# Altium PCB base-board_v0.PcbDoc (part 2 of 3)
Units mm, origin at the board's own origin, x right, y up, seen from the top; angles counter-clockwise.
Board outline 82.49 x 71.25 mm, 4 copper layers (1 Top Layer, 2 Signal Layer, 3 GND Layer, 4 Bottom Layer), stack 1.57 mm thick; 189 components, 152 nets, 678 pads, 239 vias.
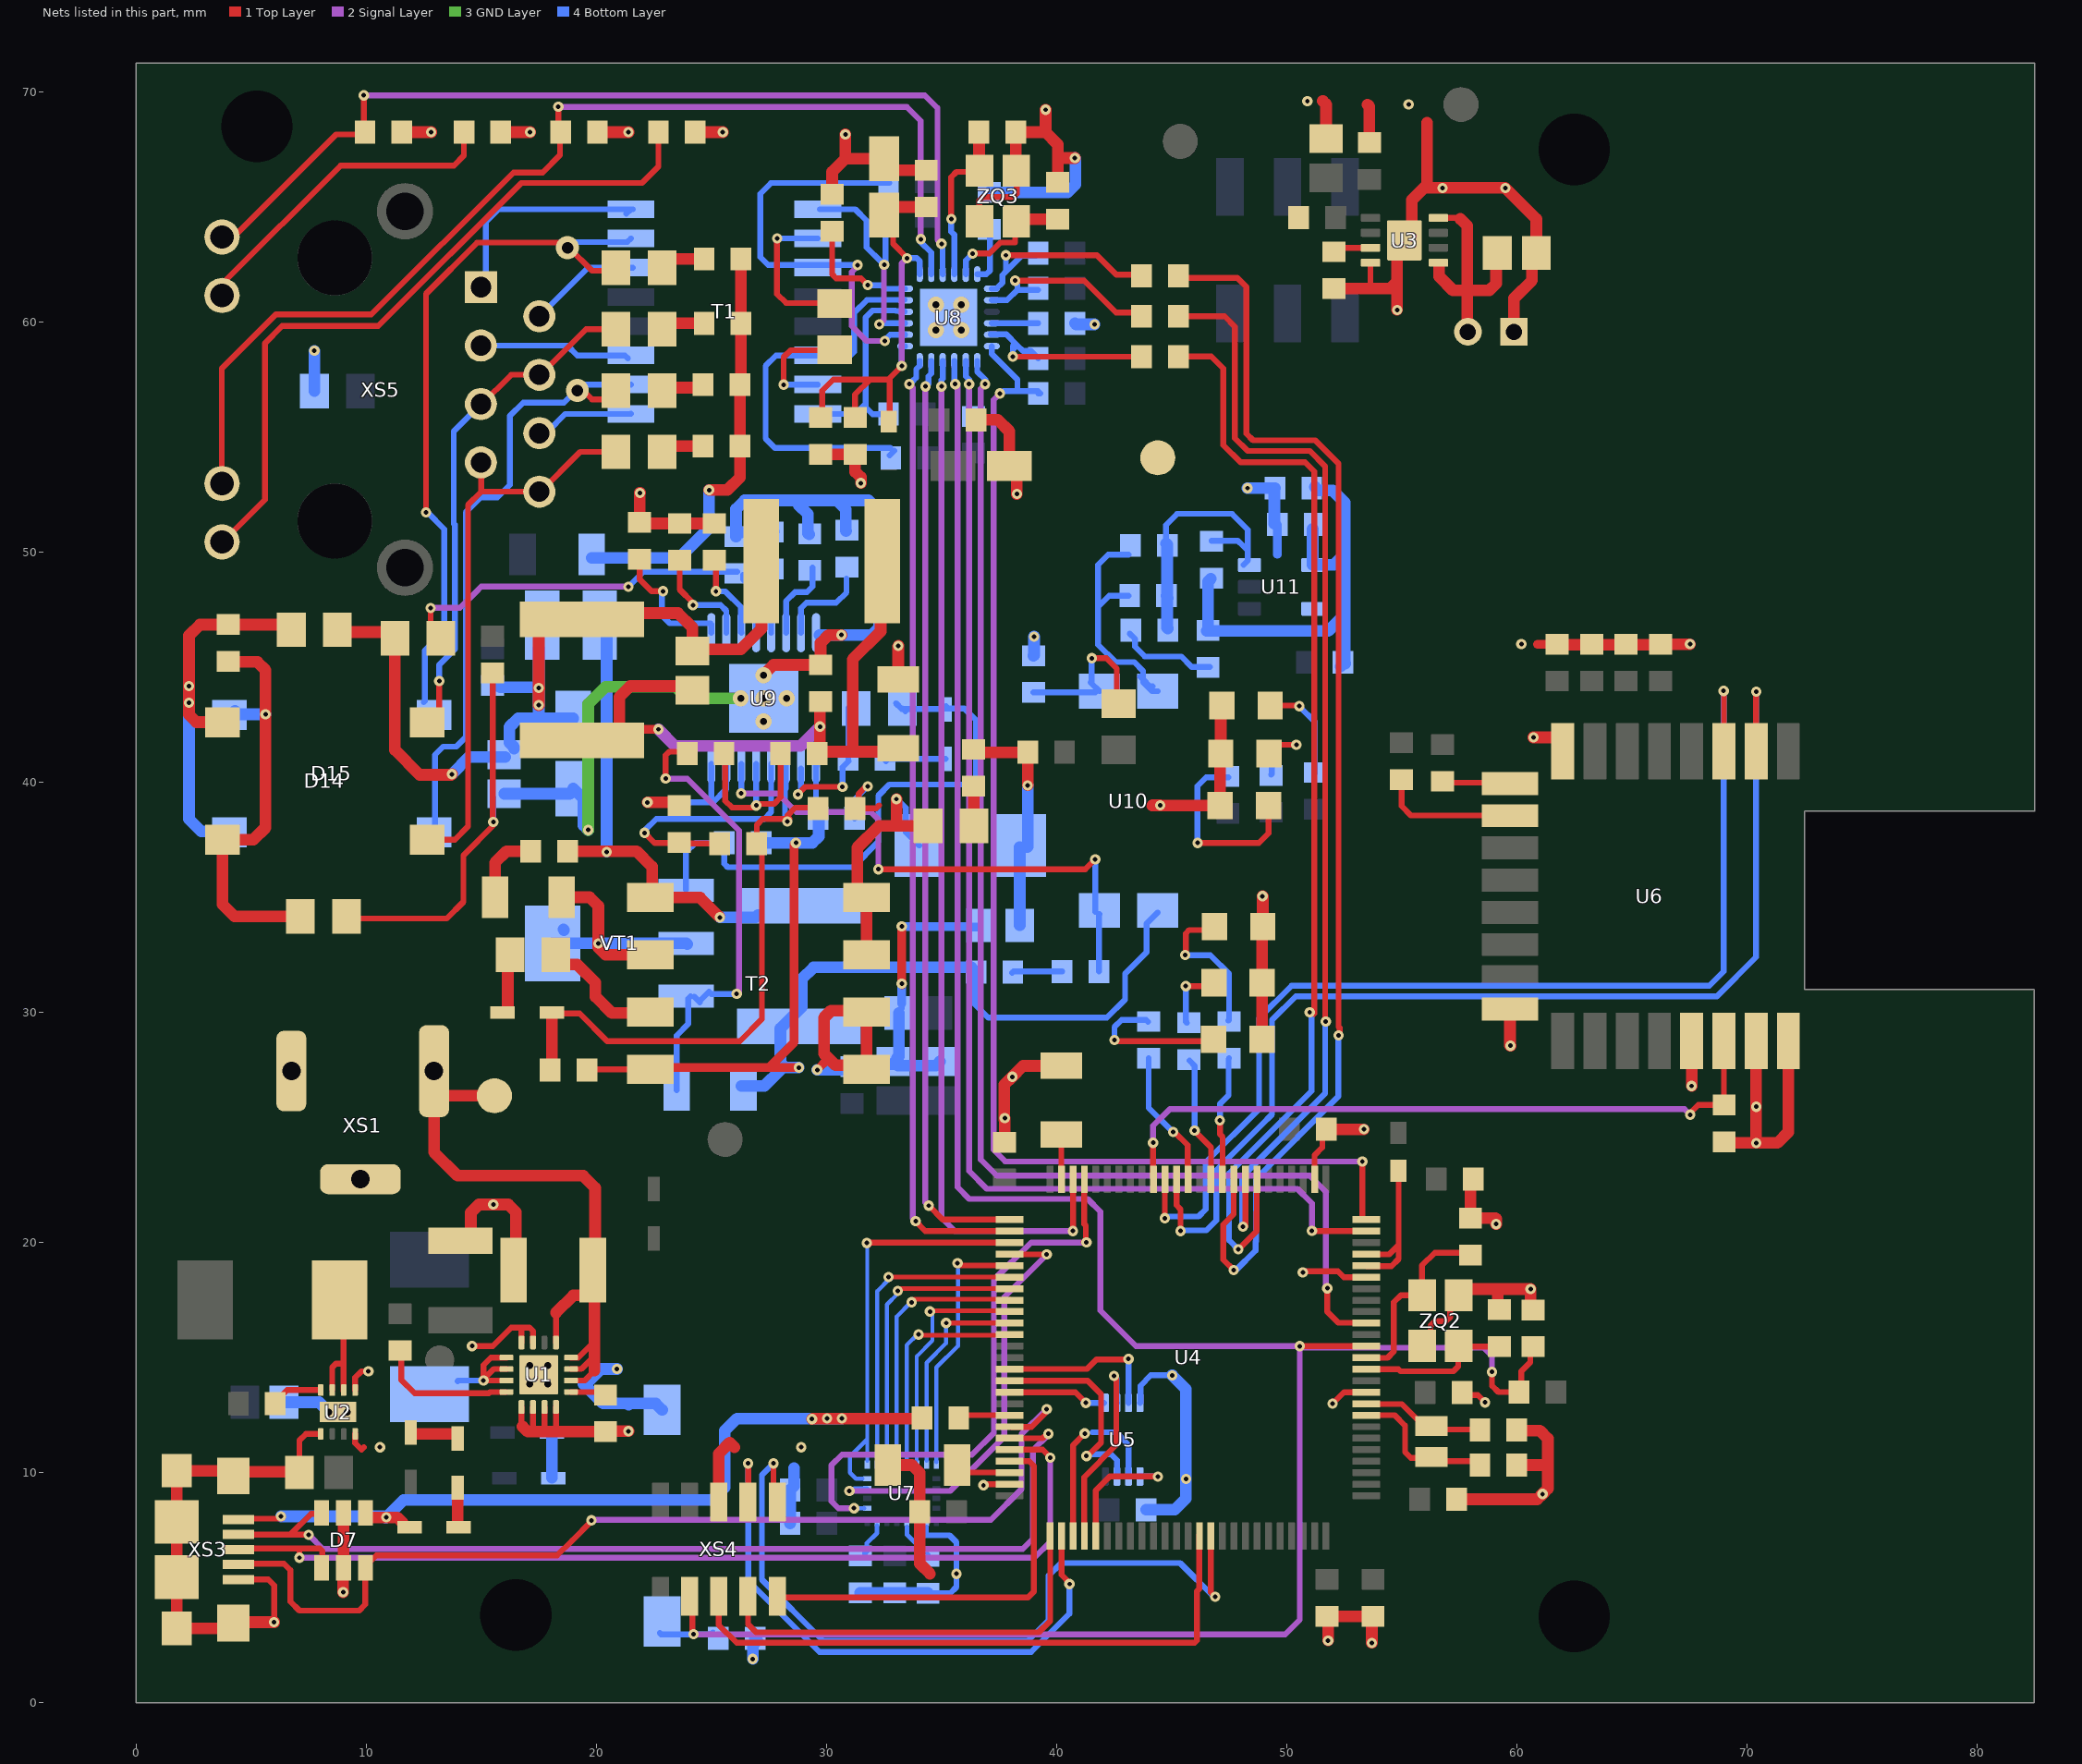
[diagram p4: the nets of this part, all layers, seen from the top]

## Via types
v1: diameter 0.45, hole 0.2, 1 Top Layer to 4 Bottom Layer, tented both sides, 217 vias
v2: diameter 0.7, hole 0.3, 1 Top Layer to 4 Bottom Layer, 11 vias
v3: diameter 0.6, hole 0.2, 1 Top Layer to 4 Bottom Layer, tented bottom, 4 vias
v4: diameter 0.7, hole 0.3, 1 Top Layer to 4 Bottom Layer, tented top, 4 vias
v5: diameter 1, hole 0.5, 1 Top Layer to 4 Bottom Layer, 2 vias
v6: diameter 0.45, hole 0.2, 1 Top Layer to 4 Bottom Layer, 1 vias

## Nets (pads, with @x,y where several pads share a name; then routed paths per layer and width w, separated by ;. In a path a pad name is that pad's centre, name@x,y a point inside that pad or via, vN(x,y) a via of type N, cw(c..) or ccw(c..) an arc to the next point about the centre after c; other vN are vias at no path point) (continued)
GND: C1.1 C2.1 C3.1 C4.1 C5.1 C6.1 C7.1 C8.1 C9.1 C10.1 C11.1 C12.1 C13.2 C14.1 C15.2 C16.1 C17.1 C18.1 C19.1 C20.1 C21.1 C22.1 C23.1 C24.1 C25.1 C26.1 C27.2 C28.2 C29.2 C30.2 C31.2 C32.2 C33.1 C34.2 C35.2 C36.2 C37.2 C38.2 C39.2 C40.2 C41.2 C42.2 C43.2 C44.2 C45.2 C66.2 C68.2 C69.1 C70.1 C71.2 C80.2 D7.2 D7.5 D8.1 D9.1 D10.1 D11.1 D12.1 D13.1 pad.9 R8.1 R25.1 R26.1 R28.1 R29.1 R30.1 R31.1 R45.2 R47.2 R59.2 R60.2 R61.2 SB1.2 U1.5 U1.6 U1.7 U1.8 U1.15 U1.16 U1.17 U2.1 U2.4 U2.5 U2.9 U3.4 U3.9 U4.10 U4.20 U4.27 U4.74 U5.4 U6.8 U6.16 U6.21 U6.23 U6.24 U7.19 U7.20 U8.25 U9.15 U9.16 U11.5 XS1.2 XS1.3 XS2.1 XS3.5 XS3.6 XS3.7 XS3.8 XS3.9 XS3.10 XS3.11 XS4.6 ZQ2.2 ZQ2.4 ZQ3.2 ZQ3.4 | length 252.4
  1 Top Layer w0.254: XS3.5@4.449,5.355 5.745,5.355 6,5.1 v1(6,3.5) ; C4.1@7.1,10.033 7.1,11.4 7.384,11.684 U2.1@8.025,11.684 ; U2.4@9.525,11.684 9.525,11.275 9.8,11 9.9,11.1 ; U2.5@9.525,13.584 9.525,14.125 9.8,14.4 v1(10.1,14.4) ; v1(14.6,15.5) 15.5,15.5 16.3,16.3 16.751,16.3 17.101,16.3 17.25,16.151 U1.15@17.25,15.65 ; U1.5@16.75,12.85 16.75,12.05 16.8,12 ; U1.16@16.75,15.65 16.75,16.299 ; 17.025,11.775 17.25,12 U1.6@17.25,12.85 ; 17.7,11.775 17.75,11.825 U1.7@17.75,12.85 ; 18.2,11.775 18.25,11.825 U1.8@18.25,12.85 ; C69.1@31.242,38.862 32.162,38.862 32.3,39 ; C69.1@31.4,39.125 31.4,39.5 31.725,39.825 v1(31.8,39.825) ; ZQ3.4@36.65,64.375 36.65,65.276 36.799,65.425 38.126,65.425 38.275,65.574 38.275,66.55 ZQ3.2@38.25,66.575 ; v1(36.825,9.45) 36.878,9.45 36.921,9.493 U4.74@37.962,9.493 ; v1(50.7,18.7) 50.75,18.75 52.225,18.75 52.482,18.493 U4.20@53.462,18.493 ; U4.27@51.212,22.743 51.212,23.787 51.55,24.125 51.55,24.75 C22.1@51.725,24.925 ; v1@52,13.1 v1(52,13) 52.493,13.493 U4.10@53.462,13.493 ; C10.1@52.05,61.45 C10.1@52.175,61.325 ; 53.6,61.45 53.643,61.493 U3.4@53.643,62.576 ; ZQ2.2@55.883,15.505 56.25,15.872 56.25,16.375 56.45,16.575 56.925,16.575 57.1,16.75 57.1,17.322 ZQ2.4@57.483,17.705 ; C26.1@57.625,13.475 57.732,13.368 58.307,13.368 v1(58.625,13.05)
  1 Top Layer w0.381: 60.9,46 C28.2@61.75,46
  1 Top Layer w0.508: XS3.7@4.224,3.455 3.999,3.23 XS3.9@1.774,3.23 XS3.11@1.774,5.455 XS3.10@1.774,7.855 XS3.8@1.774,10.08 3.999,10.08 XS3.6@4.224,9.855 4.402,10.033 C4.1@7.1,10.033 ; XS3.7@4.224,3.5 v1(6,3.5) ; v1(9,4.8) 9,5.838 D7.5@9.017,5.855 D7.2@9.017,8.255 ; R28.1@11.55,68.25 v1(12.825,68.25) ; C2.1@14.1,20.075 14.229,20.075 14.55,20.396 14.55,21.3 14.9,21.65 v1(15.525,21.65) 16.175,21.65 16.5,21.325 16.5,18.35 C1.1@16.6,18.25 ; R30.1@15.85,68.25 v1(17.125,68.25) ; 16.8,12 17.025,11.775 17.7,11.775 18.2,11.775 C3.1@20.4,11.775 20.425,11.8 v1(21.4,11.8) ; R29.1@20.05,68.25 v1(21.4,68.25) ; v1(21.9,52.575) 21.881,52.556 R45.2@21.881,51.296 21.931,51.246 C68.2@23.631,51.246 C66.2@25.131,51.246 ; v1(22.225,39.125) 23.46,39.125 C70.1@23.597,38.989 ; R31.1@24.3,68.25 v1(25.5,68.25) ; XS4.6@25.324,8.723 25.324,10.824 25.8,11.3 26,11.1 ; C39.2@29.75,54.25 C38.2@31.25,54.25 31.25,53.491 31.495,53.245 31.5,53.25 v1(31.5,53) ; R26.1@30.25,65.55 30.25,66.525 30.825,67.1 ; v1(30.825,68.15) 30.825,67.1 ; C41.2@32.512,67.093 32.512,66.996 32.908,66.6 C40.2@34.336,66.6 ; C41.2@32.512,67.1 30.825,67.1 ; C17.1@32.674,10.326 33.724,10.326 34.061,9.989 C21.1@34.061,8.306 34.061,6.039 34.5,5.6 ; C80.2@33.122,44.475 33.122,45.897 33.125,45.9 v1(33.125,45.925) ; C44.2@36.5,55.75 37.45,55.75 37.95,55.25 C42.2@37.95,53.75 38.275,53.425 v1(38.275,52.525) ; C24.1@37.744,24.359 37.675,24.428 37.741,24.494 37.7,24.535 37.75,24.585 v1@37.75,25.366 ; v1(37.75,25.4) v1@37.75,25.366 ; ZQ3.2@38.25,66.575 38.238,66.587 38.238,68.237 C43.2@38.225,68.25 39.525,68.25 ; v1(39.525,69.225) 39.525,68.25 ; C45.2@40.056,66.065 40.056,67.125 ; C18.1@40.15,27.675 38.55,27.675 v1(38.075,27.2) 37.725,26.85 37.725,25.341 v1@37.75,25.366 ; v1(40.8,67.125) 40.056,67.125 ; v1(44.5,39) 44.175,39 44.164,38.989 D11.1@47.108,38.989 47.108,41.158 D12.1@47.125,41.175 ; D13.1@47.125,43.25 47.134,43.241 D12.1@47.134,41.25 ; D10.1@48.929,28.829 48.929,31.204 D9.1@48.975,31.25 ; D9.1@48.938,31.293 48.938,33.813 D8.1@48.95,33.825 ; v1(48.95,35.05) 48.961,35.039 D8.1@48.961,33.729 ; C9.1@50.469,64.594 C9.1@50.521,64.541 ; 51.575,69.6 51.725,69.45 51.714,69.439 C7.1@51.714,67.969 ; C22.1@51.725,24.925 51.73,24.92 v1(53.355,24.92) ; v1(51.8,2.7) 51.8,3.7 C25.1@51.75,3.75 C27.2@53.75,3.75 53.7,3.7 v1(53.7,2.6) ; C10.1@52.05,61.45 53.6,61.45 54.495,61.45 54.793,61.748 ; 53.512,69.45 53.594,69.368 C8.1@53.594,67.792 ; v1(54.8,60.525) 54.793,60.532 54.793,61.748 ; 56.1,65.825 v1(56.775,65.825) v1(59.5,65.825) 60.85,64.475 C6.1@60.85,63 60.661,62.811 60.661,61.811 59.875,61.025 XS2.1@59.875,59.575 ; 56.1,68.65 56.1,65.968 55.443,65.311 55.443,63.876 U3.9@55.118,63.551 54.793,63.226 54.793,61.748 ; C20.1@57.378,8.839 60.889,8.839 v1(61.12,9.07) 61.35,9.3 61.35,10.388 ; ZQ2.4@57.483,17.705 57.753,17.975 59.177,17.975 ; C23.1@58.1,22.75 57.988,22.638 C15.2@57.988,21.056 59.069,21.056 59.1,21.025 v1(59.1,20.8) ; C13.2@59.242,17.076 59.177,17.141 59.177,17.975 ; U6.16@59.705,30.145 59.705,28.57 v1(59.725,28.55) ; C12.1@60,10.325 61.287,10.325 61.35,10.388 ; C14.1@60,11.85 60.025,11.825 61,11.825 61.35,11.475 61.35,10.388 ; C16.1@60.706,17.069 60.6,17.174 v1(60.6,17.975) 59.177,17.975 ; v1(60.725,41.95) 61.754,41.95 62,41.704 U6.8@62,41.34 ; C28.2@61.7,45.975 66.225,45.975 C31.2@66.25,46 v1(67.525,46) ; v1(67.6,26.8) U6.21@67.6,28.75 ; R8.1@69.012,24.371 69.058,24.325 v1(70.4,24.325) ; U6.23@70.4,28.75 v1(70.4,24.325) ; U6.24@71.8,28.75 71.8,24.8 71.325,24.325 v1(70.4,24.325) ; 39.525,68.25 40.056,67.719 40.056,67.125
  4 Bottom Layer w0.203: U7.20@33.912,7.8 33.912,7.538 34.175,7.275 ; 34.353,7.297 34.353,7.625
  4 Bottom Layer w0.254: v1(22.225,39.125) 25.075,39.125 ; U9.16@25,40.8 25,39.2 25.075,39.125 ; U9.15@25.65,40.8 25.65,39.7 25.075,39.125 ; R47.2@31.229,38.43 31.229,39.254 v1(31.8,39.825) ; 34.175,7.275 34.375,7.275 ; 34.353,7.297 34.375,7.275 ; C33.1@34.404,4.763 C33.1@34.417,4.75 35.375,4.75 35.65,5.025 v1(35.65,5.6) 35.65,6.975 35.35,7.275 34.375,7.275 ; U5.4@43.625,13.03 43.648,13.053 43.648,13.773 44.1,14.225 v1(45.025,14.225)
  4 Bottom Layer w0.381: 49.6,49.9 R59.2@49.6,51.2
  4 Bottom Layer w0.508: C5.1@6.426,13.056 7.953,13.056 v2(8.375,12.634) ; R61.2@7.75,57 v1(7.75,58.75) ; v1(20.9,14.5) 20.2,14.5 19.55,13.85 19.45,13.85 20.3,13 21.442,13 ; 21.4,12.958 21.442,13 ; SB1.2@22.86,12.723 22.583,13 21.442,13 ; v1(26.8,1.9) 26.8,2.492 27,2.692 C19.1@26.898,2.794 ; C36.2@28.423,7.798 C35.2@28.423,9.246 28.6,9.423 28.6,10.2 ; C32.2@31.471,4.775 C34.2@32.969,4.775 32.982,4.763 C33.1@34.404,4.763 ; C37.2@37.075,65.625 40.475,65.625 40.825,65.975 40.825,67.1 v1(40.8,67.125) ; C71.2@39,45.5 39.025,45.525 v1(39.025,46.325) ; R25.1@40.805,59.944 40.849,59.9 v1(41.65,59.9) ; C11.1@43.891,8.382 45.132,8.382 45.625,8.875 v1(45.625,9.725) 45.625,13.625 v1(45.025,14.225) ; v1(48.3,52.781) R60.2@49.492,52.781 49.467,52.756 R59.2@49.467,51.232
  other v1: 10.6,11.1 28.9,11.1 70.4,25.9 60.2,46 55.3,69.45 50.9,69.6
  other v2: 9.175,12.634 17.1,13.85 17.9,13.85 17.1,14.65 17.9,14.65
  other v4: 34.756,59.648 35.856,59.648 34.756,60.748 35.856,60.748
JTDI: U4.77 XS4.4 | length 26
  1 Top Layer w0.254: XS4.4@26.568,8.941 26.6,8.972 v1(26.6,10.4) ; U4.77@40.212,7.243 40.212,5.559 40.564,5.207 v1(40.564,5.156)
  4 Bottom Layer w0.254: v1(26.6,10.4) 26.6,5.3 29.7,2.2 38.9,2.2 40.564,3.864 v1(40.564,5.156)
JTDO: U4.89 XS4.5 | length 27
  1 Top Layer w0.254: XS4.5@25.324,4.623 25.324,3.376 26.1,2.6 46,2.6 46.1,2.7 46.1,4.845 46.2,4.945 46.2,7.287 U4.89@46.203,7.29
LED_G_A: R28.2 U8.3 XS5.9 | length 41.9
  1 Top Layer w0.254: XS5.9@3.759,63.754 4.293,63.754 8.687,68.148 R28.2@9.775,68.148 ; R28.2@9.627,68.423 R28.2@9.775,68.275 ; R28.2@9.9,68.497 v1(9.9,69.85)
  2 Signal Layer w0.254: v1(9.9,69.85) 9.875,69.875 9.9,69.875 9.925,69.85 34.275,69.85 34.825,69.3 34.825,63.575 v1(35,63.4)
  4 Bottom Layer w0.254: v1(35,63.4) 35.05,63.35 35.05,62.087 U8.3@35.056,62.081
LED_G_K: R30.2 XS5.10 | length 14.4
  1 Top Layer w0.254: XS5.10@3.736,61.152 3.736,61.648 8.89,66.802 13.818,66.802 14.249,67.234 R30.2@14.249,68.301
LED_Y_A: R29.2 U8.2 XS5.11 | length 48.6
  1 Top Layer w0.254: XS5.11@3.736,52.982 3.725,52.993 3.725,57.975 6.075,60.325 10.225,60.325 16.4,66.5 17.675,66.5 18.425,67.25 R29.2@18.425,68.175 ; R29.2@18.325,68.35 18.275,68.4 18.375,68.5 18.351,68.524 v1(18.351,69.353)
  2 Signal Layer w0.254: v1@18.325,69.425 18.351,69.399 v1@18.351,69.374 ; v1(18.351,69.353) v1@18.351,69.374 ; v1(34.1,63.6) 34.1,68.75 33.5,69.35 18.351,69.35 18.318,69.35 18.347,69.378 v1@18.351,69.374
  4 Bottom Layer w0.254: v1(34.1,63.6) 34.1,63.472 34.2,63.372 34.45,63.122 34.475,63.097 34.556,63.016 U8.2@34.556,62.081
LED_Y_K: R31.2 XS5.12 | length 31.2
  1 Top Layer w0.254: XS5.12@3.775,50.45 5.6,52.275 5.6,59.075 6.35,59.825 10.525,59.825 16.743,66.043 21.993,66.043 22.7,66.75 R31.2@22.7,68.25
MCU_LED1: R4.2 U4.35 | length 5.4
  1 Top Layer w0.254: v1(47.1,25.3) 47.1,24.7 47.219,24.581 U4.35@47.219,22.819
  4 Bottom Layer w0.254: v1(47.1,25.3) 47.1,26.025 47.475,26.4 47.475,27.975 R4.2@47.5,28
MCU_LED2: R5.2 U4.36 | length 5.5
  1 Top Layer w0.254: v1(45.999,24.867) 45.999,24.841 46.712,24.129 U4.36@46.712,22.743
  4 Bottom Layer w0.254: R5.2@45.775,27.9 45.999,27.676 v1(45.999,24.867)
MCU_LED3: R6.2 U4.38 | length 5.9
  1 Top Layer w0.254: v1(45.063,24.8) 45.125,24.8 45.7,24.225 U4.38@45.7,22.8
  4 Bottom Layer w0.254: R6.2@44,28 44,25.863 v1(45.063,24.8)
MEM_HOLD: U4.65 U5.7 | length 9.5
  1 Top Layer w0.254: U4.65@38.049,13.995 41.351,13.995 41.935,13.411 41.935,11.303 41.411,10.778 41.419,10.77 41.368,10.719 41.3,10.787 v1(41.3,10.719)
  4 Bottom Layer w0.254: v1(41.3,10.719) 41.3,10.795 41.351,10.744 v1@41.427,10.82 ; v1@41.453,10.795 42.367,10.795 42.625,10.537 U5.7@42.625,9.83
MEM_WP: U4.64 U5.3 | length 7.1
  1 Top Layer w0.254: U4.64@38.151,14.503 41.326,14.503 41.732,14.91 43.051,14.91 43.076,14.935 v1(43.129,14.935)
  4 Bottom Layer w0.254: U5.3@43.125,13.03 43.129,13.034 v1(43.129,14.935)
NetC3_2: C3.2 U1.9 | length 1.2
  1 Top Layer w0.254: U1.9@18.9,13.5 C3.2@20.1,13.5
NetC10_2: C10.2 U3.3 | length 1.6
  1 Top Layer w0.254: C10.2@52.075,63.2 52.101,63.226 U3.3@53.643,63.226
NetC12_2: C12.2 U4.8 ZQ1.2 | length 6.6
  1 Top Layer w0.254: U4.8@53.462,12.493 54.69,12.493 55.143,12.04 55.143,10.897 55.397,10.643 ZQ1.2@56.322,10.643 ; ZQ1.2@56.289,10.675 ZQ1.2@56.322,10.643 ; ZQ1.2@56.388,10.643 ZQ1.2@56.322,10.643 ; C12.2@58.4,10.325 58.4,10.352 58.252,10.5 56.465,10.5 ZQ1.2@56.322,10.643
NetC13_1: C13.1 U4.12 ZQ2.3 | length 6.7
  1 Top Layer w0.254: U4.12@53.462,14.493 54.861,14.493 54.954,14.4 57.25,14.4 57.455,14.605 57.455,15.443 ZQ2.3@57.506,15.494 ; ZQ2.3@57.531,15.469 57.538,15.476 C13.1@59.242,15.476
NetC14_2: C14.2 U4.9 ZQ1.1 | length 5.5
  1 Top Layer w0.254: U4.9@53.467,12.979 54.991,12.979 55.855,12.116 56.072,12.116 ZQ1.1@56.199,12.116 ; ZQ1.1@56.072,12.243 ZQ1.1@56.199,12.116 ; ZQ1.1@56.289,12.025 ZQ1.1@56.199,12.116 ; C14.2@58.154,11.875 56.53,11.875 56.289,12.116 ZQ1.1@56.199,12.116
NetC15_1: C15.1 U4.13 ZQ2.1 | length 8.2
  1 Top Layer w0.254: U4.13@53.442,14.986 54.381,14.986 54.661,15.265 54.661,17.399 54.966,17.704 55.784,17.704 55.883,17.605 ZQ2.1@55.883,17.705 55.883,19.002 56.439,19.558 C15.1@57.582,19.558
NetC17_2: C17.2 U4.73 | length 2.2
  1 Top Layer w0.254: C17.2@35.865,10.033 35.932,10.1 36.1,10.1 36.195,10.005 37.95,10.005 U4.73@37.962,9.993
NetC18_2: C18.2 U4.49 | length 1.5
  1 Top Layer w0.254: U4.49@40.208,23.2 C18.2@40.208,24.689
NetC32_1: C32.1 U7.24 | length 1.4
  4 Bottom Layer w0.203: C32.1@31.75,6.575 31.75,6.925 32.203,7.378 U7.24@32.203,7.7
  4 Bottom Layer w0.254: C32.1@31.675,6.5 C32.1@31.75,6.575
NetC33_2: C33.2 U7.21 | length 1.7
  4 Bottom Layer w0.203: 33.5,7.625 33.5,7.3 34.1,6.7 C33.2@34.2,6.7
  4 Bottom Layer w0.254: C33.2@34.087,6.63 34.291,6.426 C33.2@34.392,6.426
NetC37_1: C37.1 U8.6 | length 2.4
  4 Bottom Layer w0.254: U8.6@36.556,62.081 36.951,62.081 37.1,62.229 C37.1@37.1,64.025
NetC38_1: C38.1 C39.1 C40.1 C41.1 FB2.1 U8.1 U8.19 | length 20.3
  1 Top Layer w0.254: C39.1@29.75,55.85 29.82,55.92 29.82,57.02 30.3,57.5 31.9,57.5 ; C38.1@31.25,55.85 31.25,56.85 31.9,57.5 ; C41.1@32.588,64.211 32.664,64.135 C41.1@32.9,64.135 ; 32.741,57.5 31.9,57.5 ; FB2.1@32.75,55.9 32.75,57.566 33.249,58.064 v1@33.299,58.064 ; C41.1@32.9,64.9 C41.1@32.9,64.135 ; v1(33.5,62.775) 33.5,62.8 32.9,63.4 C41.1@32.9,64.135
  1 Top Layer w0.508: C41.1@32.512,64.643 32.869,65 C40.1@34.336,65
  2 Signal Layer w0.254: v1(33.274,58.09) 33.274,62.549 v1(33.5,62.775)
  4 Bottom Layer w0.254: v1(33.274,58.09) 33.274,58.936 33.286,58.948 U8.19@33.423,58.948 ; v1(33.5,62.775) 33.925,62.775 34.05,62.65 34.05,62.087 U8.1@34.056,62.081
NetC43_1: C43.1 U8.4 ZQ3.3 | length 7.2
  1 Top Layer w0.254: v1(35.425,64.475) 35.425,66.3 35.65,66.525 ZQ3.3@36.625,66.525
  1 Top Layer w0.508: C43.1@36.55,68.175 36.637,68.088 36.637,66.587 ZQ3.3@36.65,66.575
  4 Bottom Layer w0.254: v1(35.425,64.475) 35.425,63.925 35.556,63.794 U8.4@35.556,62.081
NetC45_1: C45.1 U8.5 ZQ3.1 | length 5.3
  1 Top Layer w0.254: v1(36.35,62.975) 37.09,62.975 37.57,63.455 38.2,63.455 ZQ3.1@38.2,64.4
  1 Top Layer w0.508: ZQ3.1@38.25,64.375 38.34,64.465 39.525,64.465
  4 Bottom Layer w0.254: U8.5@36.056,62.081 36.056,62.681 v1(36.35,62.975)
NetC46_2: C46.2 C48.2 C55.2 C56.2 C57.2 D16.2 L3.2 R33.2 R39.2 | length 36.2
  1 Top Layer w0.508: R33.2@8.825,46.525 10.975,46.525 R39.2@11.25,46.25 11.25,41.4 12.325,40.325 13.7,40.325 v1(13.725,40.35) ; C57.2@17.425,47.175 17.5,47.1 v1(17.5,44.1) ; v1(17.5,43.35) 17.5,44.05 v1@17.525,44.075 ; C57.2@21.025,47.35 23.55,47.35 24.175,46.725 C55.2@24.175,45.775 ; C55.2@24.175,45.7 C55.2@24.175,45.775 ; C56.2@27.175,49.6 27.175,46.675 26.275,45.775 C55.2@24.175,45.775
  4 Bottom Layer w0.508: v1(13.725,40.35) 14.475,41.1 C48.2@16.05,41.1 ; C46.2@15.748,44.196 15.819,44.125 17.375,44.125 17.5,44 v1(17.5,43.35) 17.5,42.8 ; C48.2@16.425,41.45 16.425,41.52 16.225,41.72 16.225,42.4 16.6,42.775 D16.2@19,42.775 ; v1(17.5,44.1) L3.2@17.5,45.825
NetC47_1: C47.1 D14.2 D15.2 R38.1 | length 18.5
  1 Top Layer w0.508: C47.1@4.05,45.25 4.075,45.225 5.275,45.225 5.625,44.875 v1(5.625,42.95) 5.625,38.025 5.1,37.5 D14.2@3.75,37.5 3.75,34.7 4.287,34.163 R38.1@7.144,34.163
  4 Bottom Layer w0.508: D15.2@4.275,43.075 4.3,43.1 4.45,42.95 v1(5.625,42.95)
NetC47_2: C47.2 D14.1 D15.1 R33.1 | length 17.3
  1 Top Layer w0.508: D14.1@3.75,42.6 3.736,42.614 2.623,42.614 2.3,42.937 v1(2.3,44.175) 2.3,46.375 2.775,46.85 C47.2@3.975,46.85 ; C47.2@4,46.85 6.525,46.85 R33.1@6.625,46.75
  4 Bottom Layer w0.508: v1(2.3,44.175) 2.3,38.4 2.84,37.86 4.02,37.86 D15.1@4.054,37.826
  other v1: 2.3,43.45
NetC48_1: C48.1 C53.1 C72.1 C73.1 C79.2 D16.1 R38.2 R49.1 R51.1 U9.8 U9.17 | length 59.5
  1 Top Layer w0.254: R38.2@9.225,34.1 9.25,34.075 13.5,34.075 14.225,34.8 14.225,36.825 15.525,38.125 v1(15.525,38.275) 15.5,38.3 C53.1@15.5,44.75
  1 Top Layer w0.508: v2@27.3,44.7 27.7,45.1 C79.2@29.75,45.1 29.75,46.05 30.1,46.4 v1(30.65,46.4)
  3 GND Layer w0.508: v1(19.65,37.925) 19.65,43.399 20.396,44.145 23.456,44.145 23.952,43.65 26.25,43.65 v2@26.275,43.675
  4 Bottom Layer w0.254: C48.1@15.5,39.375 15.525,39.35 v1(15.525,38.275)
  4 Bottom Layer w0.508: C48.1@16.002,39.497 18.847,39.497 D16.1@18.875,39.525 ; D16.1@19,39.725 19.443,39.282 19.443,38.132 v1(19.65,37.925) ; C72.1@26.075,50.675 26.075,51.875 26.45,52.25 27.225,52.25 ; C72.1@26.275,50.85 C72.1@26.3,50.85 ; R49.1@27.575,50.8 R49.1@27.65,50.875 ; R49.1@27.7,50.9 27.675,50.925 27.675,51.65 27.225,52.1 27.225,52.25 ; C73.1@29.25,50.775 29.2,50.825 29.2,51.65 28.775,52.075 28.775,52.25 ; U9.8@29.7,46.4 v1(30.65,46.4) 31.975,46.4 32.3,46.725 32.3,51.775 31.825,52.25 30.45,52.25 ; R51.1@30.85,50.925 30.836,50.939 30.836,51.864 30.45,52.25 ; 27.225,52.25 28.775,52.25 ; 28.775,52.25 30.45,52.25
  other v2: 27.275,42.65 26.275,43.65 27.275,43.65 28.275,43.65 27.275,44.65
NetC49_1: C49.1 C50.1 C51.1 C52.1 C54.2 | length 18.6
  1 Top Layer w0.508: v1(24.9,52.7) 25.7,52.7 26.25,53.25 C49.1@26.25,54.7 ; C49.1@26.162,54.483 26.238,54.559 C49.1@26.238,54.61 C51.1@26.238,57.277 ; C51.1@26.289,57.277 C50.1@26.289,59.944 C52.1@26.289,62.738
  4 Bottom Layer w0.508: C54.2@19.8,49.75 23.6,49.75 24.9,51.05 v1(24.9,52.7)
NetC49_2: C49.2 R34.1 | length 1.7
  1 Top Layer w0.508: R34.1@22.987,54.61 C49.2@24.638,54.61
NetC50_2: C50.2 R35.1 | length 1.6
  1 Top Layer w0.508: R35.1@23.114,59.944 C50.2@24.689,59.944
NetC51_2: C51.2 R36.1 | length 1.7
  1 Top Layer w0.508: R36.1@22.987,57.15 24.511,57.15 C51.2@24.638,57.277
NetC52_2: C52.2 R37.1 | length 1.6
  1 Top Layer w0.508: R37.1@23.114,62.611 23.114,62.621 23.231,62.738 C52.2@24.689,62.738
NetC59_1: C59.1 R42.1 | length 3.4
  1 Top Layer w0.508: R42.1@15.6,35 15.6,36.5 16.1,37 C59.1@17.15,37 C59.1@17.275,37
NetC60_1: C60.1 C65.2 D17.2 R41.1 | length 9.9
  1 Top Layer w0.508: C60.1@36.424,41.427 36.551,41.3 R41.1@38.748,41.3 v1(38.748,39.865)
  4 Bottom Layer w0.508: C65.2@38.403,33.782 D17.2@38.403,37.184 ; D17.2@38.735,37.186 38.748,37.198 v1(38.748,39.865)
NetC60_2: C60.2 R40.2 | length 1.5
  1 Top Layer w0.508: C60.2@36.398,39.827 36.398,38.329 R40.2@36.424,38.303
NetC66_1: C66.1 U9.3 | length 3.9
  1 Top Layer w0.254: C66.1@25.05,49.675 25.2,49.525 v1(25.2,48.3)
  4 Bottom Layer w0.254: v1(25.2,48.3) 25.205,48.295 25.605,48.295 26.282,47.618 26.282,46.518 U9.3@26.3,46.5
NetC67_2: C67.2 C69.2 D18.2 R44.1 U9.11 | length 27.4
  1 Top Layer w0.254: D18.2@18.07,29.947 19.279,29.947 20.472,28.753 26.238,28.753 27.2,29.715 27.2,37.1 R44.1@26.962,37.338 ; R44.1@26.975,37.338 26.975,38.151 27.224,38.4 v1@28.3,38.4 ; C69.2@29.38,38.6 C69.2@29.642,38.862 ; C69.2@29.6,38.9 28.649,38.9 28.3,38.551 v1@28.3,38.4 ; v1@28.3,38.4 28.4,38.4 v1(28.3,38.3) v1@28.3,38.4
  1 Top Layer w0.508: C67.2@18,27.5 18.07,27.57 18.07,29.947 D18.2@18.07,30
  4 Bottom Layer w0.254: v1@28.2,38.3 28.2,39.691 28.232,39.722 28.232,40.83 U9.11@28.245,40.843
NetC68_1: C68.1 U9.2 | length 4.7
  1 Top Layer w0.254: C68.1@23.625,49.65 23.625,48.375 24.2,47.8 v1(24.2,47.7)
  4 Bottom Layer w0.254: v1(24.2,47.7) 25.4,47.7 25.65,47.45 U9.2@25.65,46.5
NetC70_2: C70.2 R44.2 U9.12 | length 11.5
  1 Top Layer w0.254: v1(22.1,37.8) 22.537,37.363 C70.2@23.647,37.363 ; C70.2@23.622,37.44 23.724,37.338 R44.2@25.362,37.338
  4 Bottom Layer w0.254: v1(22.1,37.8) 22.1,37.899 22.606,38.405 27.305,38.405 27.6,38.7 U9.12@27.6,40.8
NetC71_1: C71.1 R46.1 U10.1 | length 7
  1 Top Layer w0.254: v1(41.529,45.39) 42.164,45.39 42.621,44.933 R46.1@42.621,43.51
  4 Bottom Layer w0.254: C71.1@39,43.9 U10.1@41.69,43.9 ; v1(41.529,45.39) 41.529,44.386 41.478,44.336 U10.1@41.859,43.955
NetC72_2: C72.2 R39.1 U9.4 | length 18.2
  1 Top Layer w0.254: v1(12.8,47.575) 12.8,46.7 R39.1@13.25,46.25
  2 Signal Layer w0.254: v1(12.8,47.575) 14.075,47.575 14.775,48.275 15,48.5 v1(21.4,48.5)
  4 Bottom Layer w0.254: v1(21.4,48.5) 22.05,49.15 C72.2@26.125,49.15 ; C72.2@26.375,49 26.375,48.825 26.95,48.25 U9.4@26.95,46.5
NetC73_2: C73.2 U9.6 | length 3.6
  4 Bottom Layer w0.254: U9.6@28.25,46.5 28.25,47.875 28.625,48.25 28.632,48.257 29.157,48.257 29.4,48.5 C73.2@29.4,49.325
NetC74_1: C74.1 R54.2 R56.1 R59.1 R60.1 U11.4 | length 20.6
  4 Bottom Layer w0.508: R56.1@46.533,46.571 51.803,46.571 52.527,47.295 ; R56.1@46.584,46.596 46.584,48.717 C74.1@46.711,48.844 ; R59.1@51.13,51.003 51.13,49.45 52.066,49.45 52.527,49.911 ; R60.1@51.232,52.832 51.384,52.68 51.994,52.68 52.527,52.146 52.527,49.911 ; R54.2@52.351,45.037 R54.2@52.527,45.212 ; R54.2@52.553,45.161 52.527,45.187 R54.2@52.527,45.212 ; R54.2@52.527,45.212 52.527,47.295 ; 52.527,47.295 52.527,49.911
NetC74_2: C74.2 C76.1 C77.1 R53.1 U11.3 | length 12
  4 Bottom Layer w0.254: R53.1@44.755,50.368 44.755,51.181 45.237,51.664 47.625,51.664 48.311,50.978 48.311,50.063 ; C74.2@46.736,50.495 47.879,50.495 48.125,50.249 48.311,50.063 ; U11.3@48.125,49.45 48.311,49.636 48.311,50.063
  4 Bottom Layer w0.508: R53.1@44.767,50.368 44.806,50.33 C76.1@44.806,48.032 ; C76.1@44.78,48.108 44.805,48.082 C76.1@44.805,48.032 ; C77.1@44.831,46.685 44.805,46.711 C76.1@44.805,48.032 ; C76.1@44.831,48.006 C76.1@44.805,48.032
NetC75_2: C75.2 R48.1 | length 2.2
  4 Bottom Layer w0.254: C75.2@38.075,31.725 C75.2@38.1,31.75 38.125,31.775 R48.1@40.246,31.775
NetC76_2: C76.2 R53.2 U10.2 | length 10.9
  4 Bottom Layer w0.254: C76.2@43.129,48.108 42.291,48.108 41.808,47.625 ; R53.2@43.129,49.886 42.24,49.886 41.808,49.454 41.808,47.625 ; U10.2@43.636,44.59 U10.2@43.764,44.462 ; U10.2@44.171,44.171 44.056,44.171 U10.2@43.764,44.462 ; U10.2@44.399,43.955 44.158,43.955 43.764,44.348 U10.2@43.764,44.462 ; 41.808,47.625 41.808,45.974 42.558,45.225 43.375,45.225 43.764,44.836 U10.2@43.764,44.462
NetC77_2: C77.2 R56.2 | length 4.3
  4 Bottom Layer w0.254: C77.2@43.18,46.457 43.409,46.228 43.409,45.891 43.834,45.466 45.415,45.466 45.872,45.009 R56.2@46.66,45.009
NetC78_2: C78.2 R55.1 U9.13 | length 8.6
  1 Top Layer w0.254: R55.1@25.603,41.3 25.603,39.192 25.895,38.9 26.86,38.9 v1(26.949,38.989) 27.018,39.057 27.729,39.057 28.016,39.345 C78.2@28.016,41.326
  4 Bottom Layer w0.254: v1(26.949,38.989) U9.13@26.95,40.8
NetD2_2: D2.2 D3.1 | length 2
  4 Bottom Layer w0.508: D2.2@18.07,11.75 18.07,9.78 D3.1@18.075,9.775
NetD4_2: D4.2 D5.1 | length 1.7
  1 Top Layer w0.508: D5.1@13.97,9.344 13.97,7.747 D4.2@14.021,7.696
NetD5_2: D5.2 D6.1 | length 2.2
  1 Top Layer w0.508: D6.1@11.938,11.684 13.954,11.684 13.97,11.668 D5.2@13.97,11.484
NetD8_2: D8.2 R4.1 | length 6.6
  1 Top Layer w0.254: v1(45.593,32.487) 45.618,32.512 45.618,33.43 45.767,33.579 46.711,33.579 D8.2@46.861,33.729
  4 Bottom Layer w0.254: v1(45.593,32.487) 46.685,32.487 47.498,31.674 47.498,29.667 R4.1@47.473,29.642
NetD9_2: D9.2 R5.1 | length 2.9
  1 Top Layer w0.254: v1(45.618,31.14) 46.685,31.14 D9.2@46.838,31.293
  4 Bottom Layer w0.254: v1(45.618,31.14) 45.618,29.591 R5.1@45.669,29.54
NetD10_2: D10.2 R6.1 | length 6.5
  1 Top Layer w0.254: v1(42.52,28.804) 42.57,28.753 46.753,28.753 D10.2@46.829,28.829
  4 Bottom Layer w0.254: v1(42.52,28.804) 42.52,29.362 42.824,29.667 43.891,29.667 R6.1@43.967,29.591
NetD11_2: D11.2 R11.1 | length 8.4
  1 Top Layer w0.254: v1(46.126,37.363) 48.793,37.363 49.208,37.778 D11.2@49.208,38.989
  4 Bottom Layer w0.254: v1(46.126,37.363) 46.126,39.827 46.507,40.208 R11.1@47.473,40.208
NetD12_2: D12.2 R12.1 | length 3.5
  1 Top Layer w0.254: D12.2@49.234,41.25 49.615,41.631 v1(50.419,41.631)
  4 Bottom Layer w0.254: R12.1@49.327,40.335 49.352,40.361 49.352,41.275 49.708,41.631 v1(50.419,41.631)
NetD13_2: D13.2 R13.1 | length 4.5
  1 Top Layer w0.254: D13.2@49.285,43.332 50.521,43.332 v1(50.546,43.307)
  4 Bottom Layer w0.254: v1(50.546,43.307) 51.232,42.621 R13.1@51.232,40.386
NetD14_3: D14.3 R34.2 XS5.7 XS5.8 | length 24.8
  1 Top Layer w0.254: D14.3@12.65,37.5 13.85,37.5 14.425,38.075 14.425,52.05 15.002,52.627 ; XS5.7@15.025,53.825 15.002,53.802 15.002,52.627 ; XS5.8@17.526,52.578 19.304,54.356 20.352,54.356 R34.2@20.86,53.848 ; XS5.8@17.526,52.627 15.002,52.627
NetD14_4: D14.4 R35.2 XS5.4 XS5.5 | length 22.3
  1 Top Layer w0.254: D14.4@12.65,42.6 13.175,43.125 v1(13.175,44.4) ; XS5.5@14.986,56.388 16.305,57.707 XS5.4@17.526,57.707 ; XS5.4@17.526,57.658 19.558,59.69 20.447,59.69 R35.2@20.828,59.309
  4 Bottom Layer w0.254: v1(13.175,44.4) 13.175,45.1 13.857,45.782 13.857,51.189 13.807,51.239 13.807,55.258 14.949,56.4 XS5.5@15.1,56.4
NetD15_3: D15.3 R37.2 T1.15 | length 31.7
  1 Top Layer w0.254: v1(12.6,51.725) 12.6,61.225 14.825,63.45 18.525,63.45 v5(18.75,63.225) 18.817,63.225 19.812,62.23 20.701,62.23 R37.2@20.828,62.357
  4 Bottom Layer w0.254: D15.3@12.331,42.953 12.5,42.784 D15.3@12.5,42.425 ; D15.3@12.5,43.481 12.55,43.531 12.55,45.725 13.4,46.575 13.4,51 12.675,51.725 v1(12.6,51.725) ; v5(18.75,63.225) 19,63.475 21.345,63.475 T1.15@21.5,63.63
NetD15_4: D15.4 R36.2 T1.10 | length 28.2
  1 Top Layer w0.254: v5(19.177,57.023) 19.431,57.023 19.812,56.642 R36.2@20.955,56.642
  4 Bottom Layer w0.254: D15.4@12.954,37.826 12.989,37.861 12.989,41.189 13.35,41.55 13.925,41.55 14.325,41.95 14.325,51.725 14.975,52.375 15.7,52.375 16.25,52.925 16.25,55.925 16.825,56.5 18.6,56.5 18.975,56.875 19.177,56.875 v5(19.177,57.023) 19.177,57.277 19.18,57.28 T1.10@21.5,57.28
NetD18_1: D18.1 R43.1 | length 2.7
  1 Top Layer w0.254: 16.154,31.7 R43.1@16.154,32.512
  1 Top Layer w0.508: D18.1@15.93,30 16.138,30 16.154,30.016 16.154,31.7
NetD19_1: D19.1 R50.2 R58.2 VT1.1 | length 24.7
  4 Bottom Layer w0.254: VT1.1@23.901,35.331 23.901,36.957 24.308,37.363 R58.2@25.565,37.363 25.565,36.458 25.714,36.309 31.153,36.309 32.258,37.414 32.258,39.421 32.741,39.903 36.322,39.903 36.5,40.081 36.5,42.697 35.992,43.205 D19.1@35.204,43.205 ; R50.2@33.02,43.434 33.274,43.18 R50.2@33.325,43.18 ; R50.2@33.299,43.205 R50.2@33.325,43.18 ; R50.2@33.426,43.078 R50.2@33.325,43.18 ; D19.1@35.204,43.307 35.077,43.18 33.426,43.18 R50.2@33.325,43.18
NetD19_2: D19.2 R52.2 | length 2.6
  4 Bottom Layer w0.254: R52.2@32.588,40.919 32.687,41.018 D19.2@35.179,41.018
NetFB1_1: FB1.1 U4.21 U4.22 | length 6.9
  1 Top Layer w0.254: U4.21@53.462,18.993 53.481,18.974 54.559,18.974 54.864,19.279 54.864,19.888 ; U4.22@53.518,19.482 54.458,19.482 54.864,19.888 ; FB1.1@54.864,23.114 54.864,19.888
NetL1_1: L1.1 U1.1 U1.2 U1.3 | length 5.1
  1 Top Layer w0.254: v1(15.1,14) 15.175,14 v1@15.2,13.975 ; v1@15.225,14 U1.3@16.1,14 ; U1.2@16.1,14.5 15.55,14.5 15.1,14.05 15.1,14.675 15.425,15 U1.1@16.1,15
  4 Bottom Layer w0.254: L1.1@13.975,13.975 14,14 v1(15.1,14)
NetL2_1: L2.1 U2.6 U2.7 | length 4.6
  1 Top Layer w0.254: U2.7@8.525,13.584 8.525,14.57 8.687,14.732 9.017,14.732 ; L2.1@8.788,16.459 9.017,16.231 9.017,14.732 ; U2.6@9.017,13.538 9.017,14.732
NetR1_1: R1.1 U1.4 | length 6.3
  1 Top Layer w0.254: R1.1@11.684,15.456 11.532,15.304 11.532,14.021 12.108,13.445 15.33,13.445 15.385,13.5 U1.4@16.075,13.5
NetR2_1: R2.1 U2.8 | length 2.1
  1 Top Layer w0.254: R2.1@6.147,13.157 6.157,13.157 6.373,13.373 6.373,13.383 6.574,13.584 U2.8@8.025,13.584
NetR3_2: R3.2 U4.68 | length 2.1
  1 Top Layer w0.254: R3.2@35.839,12.497 35.843,12.493 U4.68@37.962,12.493
NetR8_2: R8.2 U4.41 U6.22 | length 30.5
  1 Top Layer w0.254: v1(44.196,24.333) 44.196,22.86 U4.41@44.221,22.835 ; v1(67.539,25.552) 67.539,25.629 67.881,25.971 R8.2@69,25.971 ; R8.2@69,25.908 R8.2@69,25.971 ; U6.22@69,28.75 R8.2@69,25.971 ; R8.2@69.012,25.971 R8.2@69,25.971
  2 Signal Layer w0.254: v1(44.196,24.333) 44.196,25.07 44.926,25.8 67.291,25.8 v1(67.539,25.552)
NetR9_1: R9.1 U6.10 | length 6.1
  1 Top Layer w0.254: R9.1@54.686,40.081 54.991,39.776 54.991,38.964 55.397,38.557 59.693,38.557 U6.10@59.705,38.545
NetR10_1: R10.1 U6.9 | length 3.2
  1 Top Layer w0.254: R10.1@56.49,39.98 59.67,39.98 U6.9@59.705,39.945
NetR18_1: R18.1 R23.1 U8.8 | length 8.9
  1 Top Layer w0.254: v1(38.2,61.8) 41.2,61.8 42.589,60.411 43.5,60.411 R23.1@43.637,60.274
  4 Bottom Layer w0.254: U8.8@37.189,60.948 37.848,60.948 38.3,61.4 ; v1@38.1,61.8 38.1,61.785 v1@38.2,61.685 ; v1(38.2,61.8) 38.2,61.747 38.3,61.647 38.3,61.4 ; R18.1@39.2,61.4 38.3,61.4
NetR19_1: R19.1 R24.1 U8.7 | length 9.7
  1 Top Layer w0.254: v1(37.8,62.9) 41.752,62.9 42.6,62.052 43.637,62.052 R24.1@43.663,62.078
  4 Bottom Layer w0.254: U8.7@37.189,61.448 37.386,61.448 37.643,61.704 37.643,62.043 37.8,62.2 ; v1(37.8,62.9) 37.8,62.2 ; 38.481,62.881 39.107,62.881 R19.1@39.116,62.89 ; 38.5,62.9 37.8,62.2
NetR20_1: R20.1 R27.1 U8.11 | length 9
  1 Top Layer w0.254: v1(38.1,58.5) 38.104,58.496 R27.1@43.688,58.496
  4 Bottom Layer w0.254: U8.11@37.135,59.461 37.821,59.461 38.291,58.991 ; v1(38.1,58.5) 38.1,58.8 ; 38.202,59.055 38.1,58.953 38.1,58.8 ; R20.1@39.205,58.42 38.886,58.739 38.543,58.739 38.291,58.991 ; 38.1,58.8 38.291,58.991
NetR21_1: R21.1 U4.25 U8.12 | length 56
  1 Top Layer w0.254: v1(53.289,23.52) 53.289,21.107 U4.25@53.315,21.082
  2 Signal Layer w0.254: v1(37.541,56.896) 37.262,56.617 37.262,24.028 37.77,23.52 v1(53.289,23.52)
  4 Bottom Layer w0.254: U8.12@37.189,58.948 37.189,58.611 38.3,57.5 38.3,57.051 38.249,57 ; v1@37.5,56.9 v1@37.537,56.9 ; v1@37.5,56.937 v1@37.537,56.9 ; R21.1@39.205,56.896 R21.1@39.218,56.896 ; R21.1@39.3,56.9 39.2,57 38.249,57 ; v1@37.537,56.9 37.598,56.9 37.698,57 38.249,57
NetR22_1: R22.1 U4.24 U8.14 | length 55.3
  1 Top Layer w0.254: v1(51.1,20.5) 53.287,20.5 U4.24@53.289,20.498
  2 Signal Layer w0.254: v1(36.2,57.3) 36.2,23.1 36.966,22.334 50.466,22.334 51.043,21.757 51.1,21.7 v1(51.1,20.5)
  4 Bottom Layer w0.254: U8.14@36.056,58.315 36.061,58.311 36.061,57.639 36.2,57.5 v1(36.2,57.3) 36.2,56.271 36.172,56.242 36.187,56.227 R22.1@36.17,56.21
NetR23_2: R23.2 U4.33 | length 48.6
  1 Top Layer w0.254: R23.2@45.3,60.25 47.3,60.25 47.75,59.8 47.75,54.95 48.3,54.4 51,54.4 51.675,53.725 51.675,29.55 51.7,29.575 v1(51.7,29.6) ; v1@48.184,20.676 48.209,20.701 48.209,22.74 U4.33@48.212,22.743
  4 Bottom Layer w0.254: v1(48.095,20.688) 48.057,20.726 48.057,22.857 51.675,26.475 51.675,29.475 v1@51.725,29.525
NetR24_2: R24.2 U4.34 | length 55.5
  1 Top Layer w0.254: R24.2@45.3,62 45.384,61.916 47.859,61.916 48.25,61.525 48.25,55.15 48.543,54.857 51.243,54.857 52.255,53.845 52.255,29.37 52.3,29.325 52.3,29.05 v1(52.25,29) ; v1(47.7,18.8) 47.248,19.252 47.248,20.781 47.7,21.233 47.7,22.75 U4.34@47.725,22.775
  4 Bottom Layer w0.254: v1(47.7,18.8) 47.8,18.8 48.645,19.645 48.645,20.03 48.666,20.052 48.666,22.766 52.25,26.35 v1(52.25,29)
NetR25_2: R25.2 U8.10 | length 2
  4 Bottom Layer w0.254: U8.10@37.186,59.944 R25.2@39.205,59.944
NetR26_2: R26.2 U8.24 | length 5.3
  1 Top Layer w0.254: R26.2@30.25,63.95 30.25,62.075 30.425,61.9 31.5,61.9 v1(31.8,61.6)
  4 Bottom Layer w0.254: v1(31.8,61.6) 32.4,61.6 32.552,61.448 U8.24@33.423,61.448
NetR27_2: R27.2 U4.32 | length 49.1
  1 Top Layer w0.254: R27.2@45.3,58.5 46.725,58.5 47.25,57.975 47.25,54.65 48,53.9 50.8,53.9 51.2,53.5 51.2,29.95 51.179,29.929 51.109,30 v1(51,30) ; v1(47.9,19.7) 48.688,20.488 48.688,21.319 48.7,21.332 48.7,22.725 U4.32@48.725,22.75
  4 Bottom Layer w0.254: v1(47.9,19.7) 47.5,20.1 47.5,23 51.075,26.575 51.075,29.925 v1(51,30)
NetR32_1: R32.1 T1.2 | length 7
  1 Top Layer w0.254: v1(27.855,63.63) 27.855,61.22 28.25,60.825 R32.1@30.475,60.825
  4 Bottom Layer w0.254: v1(27.855,63.63) T1.2@29.625,63.63
NetR32_2: R32.2 T1.7 | length 5
  1 Top Layer w0.254: v1(28.143,57.277) 28.143,58.471 28.448,58.776 30.124,58.776 R32.2@30.251,58.649
  4 Bottom Layer w0.254: v1(28.143,57.277) 29.622,57.277 T1.7@29.625,57.28
NetR45_1: R45.1 U9.1 | length 5.8
  1 Top Layer w0.254: R45.1@21.825,49.65 21.886,49.589 21.886,48.814 22.4,48.3 v1(22.9,48.3)
  4 Bottom Layer w0.254: v1@22.85,48.25 22.85,47.25 23.193,46.907 24.956,46.907 25,46.863 U9.1@25,46.5
NetR48_2: R48.2 U9.14 U10.4 | length 24.3
  1 Top Layer w0.254: v1(32.258,36.22) 41.25,36.22 v1(41.681,36.652)
  2 Signal Layer w0.254: v1(26.3,39.511) 27.889,39.511 28.69,38.71 31.928,38.71 32.258,38.379 v1(32.258,36.22)
  4 Bottom Layer w0.254: v1(26.3,39.511) U9.14@26.3,40.8 ; U10.4@41.681,34.366 v1(41.681,36.652) ; R48.2@41.846,31.775 41.846,34.252 U10.4@41.859,34.265
NetR49_2: R49.2 U9.5 | length 2.7
  4 Bottom Layer w0.254: U9.5@27.6,46.5 27.6,48.975 R49.2@27.775,49.15
NetR50_1: R50.1 R52.1 U9.10 | length 6.8
  1 Top Layer w0.254: v1(28.764,39.469) 28.764,39.483 29.081,39.8 v1(30.7,39.8)
  4 Bottom Layer w0.254: v1@28.755,39.478 v1(28.764,39.469) 28.764,39.522 28.9,39.658 U9.10@28.9,40.6 ; v1(30.7,39.8) 30.7,40.657 R52.1@30.963,40.919 ; R52.1@30.95,41 30.95,43.218 R50.1@30.988,43.256
NetR51_2: R51.2 U9.7 | length 3.9
  4 Bottom Layer w0.254: U9.7@28.9,46.5 28.9,47.565 29.135,47.8 30.425,47.8 30.875,48.25 30.875,48.85
NetR55_2: R55.2 R57.2 VT1.3 | length 19.7
  1 Top Layer w0.254: v1(23.012,40.157) 23.012,41.173 23.165,41.326 23.749,41.326 R55.2@23.927,41.148
  2 Signal Layer w0.254: v1(23.012,40.157) 23.952,40.157 26.2,37.91 26.195,37.905 26.2,37.9 26.2,30.9 v1(26.1,30.8)
  4 Bottom Layer w0.254: R57.2@23.493,26.619 23.493,28.993 24,29.5 24,30.6 VT1.3@24.1,30.7 ; VT1.3@24.257,30.683 VT1.3@24.5,30.44 ; VT1.3@24.571,30.571 24.9,30.9 25,30.8 v1(26.1,30.8)
NetU4_16: U4.16 U8.13 | length 57.7
  1 Top Layer w0.254: v1(51.765,18.009) 51.765,16.993 52.248,16.51 U4.16@53.467,16.51
  2 Signal Layer w0.254: v1(36.9,57.3) 36.7,57.1 36.7,23.6 37.4,22.9 37.7,22.9 ; 37.722,22.9 51,22.9 51.7,22.2 51.7,18.1 v1@51.8,18
  4 Bottom Layer w0.254: U8.13@36.556,58.315 36.556,57.844 36.9,57.5 v1(36.9,57.3)
NetU4_39: U4.39 U6.2 | length 50.1
  1 Top Layer w0.254: U4.39@45.212,22.682 45.212,21.615 45.39,21.438 v1(45.39,20.498) ; v1@70.392,43.824 70.392,43.925 v1(70.4,43.933) U6.2@70.4,41.34
  4 Bottom Layer w0.254: v1(45.39,20.498) 45.415,20.523 46.507,20.523 46.943,20.959 46.943,23.143 48.907,25.107 49.365,25.565 49.365,29.665 50.4,30.7 68.7,30.7 70.4,32.4 v1(70.4,43.933)
NetU4_40: U4.40 U6.3 | length 48.6
  1 Top Layer w0.254: v1(44.704,21.057) 44.704,22.555 U4.40@44.729,22.581 ; v1(68.986,43.967) 69,43.954 U6.3@69,41.34
  4 Bottom Layer w0.254: v1(44.704,21.057) 44.777,21.129 46.174,21.129 46.486,21.441 46.486,23.486 48.8,25.8 48.8,29.192 ; 48.8,29.2 48.8,29.747 50.211,31.157 68.368,31.157 68.986,31.775 v1(68.986,43.967)
NetU4_47: U4.47 U7.2 | length 24.9
  1 Top Layer w0.254: v1@41.173,20.015 41.271,20.113 41.271,20.728 41.2,20.799 41.2,22.731 U4.47@41.212,22.743
  2 Signal Layer w0.254: v1(31.2,8.45) 30.525,8.45 30.225,8.75 30.225,10.325 30.675,10.775 36.325,10.775 37.275,11.725 37.275,18.375 38.9,20 v1(41.3,20)
  4 Bottom Layer w0.178: v1@31.203,8.447 U7.2@31.65,8.447
  4 Bottom Layer w0.254: v1(31.2,8.45) v1@31.203,8.447
NetU4_48: U4.48 U8.16 | length 45.2
  1 Top Layer w0.254: v1(40.716,20.498) U4.48@40.716,22.657
  2 Signal Layer w0.254: v1(35,57.2) 35,21.083 35.585,20.498 v1@40.531,20.498
  4 Bottom Layer w0.254: v1(35,57.2) 35,57.485 35.056,57.541 U8.16@35.056,58.315
NetU4_51: U4.51 U8.17 | length 40.8
  1 Top Layer w0.254: v1(34.45,21.6) 34.425,21.575 34.475,21.575 35.05,21 U4.51@38.004,21 ; U4.51@37.988,21.016 U4.51@38.004,21 ; U4.51@38.075,21 U4.51@38.004,21
  2 Signal Layer w0.254: v1(34.3,57.2) 34.3,21.74 v1@34.44,21.6
  4 Bottom Layer w0.254: v1(34.3,57.2) 34.327,57.2 34.438,57.311 34.438,57.638 34.556,57.756 U8.17@34.556,58.315
NetU4_52: U4.52 U8.18 | length 42
  1 Top Layer w0.254: v1(33.875,20.925) 34.3,20.5 37.995,20.5 U4.52@37.998,20.503
  2 Signal Layer w0.254: v1(33.6,57.3) 33.753,57.147 33.753,21.047 v1(33.875,20.925)
  4 Bottom Layer w0.254: v1(33.6,57.3) 33.642,57.3 33.745,57.403 33.745,57.43 33.901,57.586 33.901,57.948 34.056,58.103 U8.18@34.056,58.315
NetU4_53: U4.53 U7.5 U7.6 | length 18.1
  1 Top Layer w0.254: v1@31.75,19.9 31.823,19.9 31.916,19.993 U4.53@37.962,19.993
  4 Bottom Layer w0.178: 31.575,9.737 31.284,9.737 31.025,9.996 31.025,10.7 31.75,11.425 ; 31.775,10.525 v1@31.775,19.95
  4 Bottom Layer w0.254: v1(31.75,19.975) v1@31.775,19.95
NetU4_54: U4.54 U7.4 | length 18.9
  1 Top Layer w0.254: U4.54@37.9,19.5 37.925,19.475 37.932,19.482 v1(39.573,19.482)
  2 Signal Layer w0.254: v1(31,9.2) 35.375,9.2 37.725,11.55 37.725,17.625 39.573,19.473 v1(39.573,19.482)
  4 Bottom Layer w0.178: v1@31.095,9.2 31.202,9.307 U7.4@31.773,9.307
  4 Bottom Layer w0.254: v1(31,9.2) v1@31.095,9.2
NetU4_55: U4.55 U7.13 | length 11.4
  1 Top Layer w0.254: v1(35.7,19.1) 35.7,19.025 35.675,19 U4.55@37.95,19
  4 Bottom Layer w0.178: U7.13@34.783,10.45 34.783,14.567 35.717,15.502 35.717,19.083 v1(35.7,19.1)
NetU4_56: U4.56 U7.7 | length 13.5
  1 Top Layer w0.203: v1@32.778,18.5 U4.56@37.925,18.5
  1 Top Layer w0.254: v1(32.7,18.5) v1@32.778,18.5
  4 Bottom Layer w0.178: 32.203,10.525 32.203,17.878 v1@32.775,18.45
  4 Bottom Layer w0.254: v1(32.7,18.5) 32.725,18.5 v1@32.775,18.45
NetU4_57: U4.57 U7.8 | length 12.3
  1 Top Layer w0.152: v1(33.1,17.9) v1@33.204,18.004 ; 33.984,18.004 33.988,18
  1 Top Layer w0.203: v1@33.204,18.004 33.984,18.004 ; 33.988,18 U4.57@37.775,18
  4 Bottom Layer w0.178: 32.633,10.525 32.633,17.308 33.1,17.775 v1(33.1,17.9)
NetU4_58: U4.58 U7.9 | length 11.5
  1 Top Layer w0.152: v1(33.7,17.4) 33.7,17.425 v1@33.779,17.504 ; U4.58@37.996,17.504 U4.58@38,17.5
  1 Top Layer w0.203: v1@33.779,17.504 33.805,17.53 37.97,17.53 U4.58@37.996,17.504
  4 Bottom Layer w0.178: 33.05,10.525 33.05,16.775 33.675,17.4 v1(33.7,17.4)
NetU4_59: U4.59 U7.11 | length 10.2
  1 Top Layer w0.152: v1(34.5,17) v1@34.504,17.004 ; U4.59@37.896,17.004 U4.59@37.9,17
  1 Top Layer w0.203: v1@34.504,17.004 34.53,17.03 37.87,17.03 U4.59@37.896,17.004
  4 Bottom Layer w0.178: 33.923,10.525 33.923,15.048 34.608,15.733 34.608,16.908 34.516,17 v1(34.5,17)
NetU4_60: U4.60 U7.12 | length 9.1
  1 Top Layer w0.203: v1(35.2,16.5) U4.60@37.925,16.5
  4 Bottom Layer w0.178: 34.353,10.525 34.353,14.778 35.2,15.625 v1(35.2,16.5)
NetU4_61: U4.61 U7.10 | length 9.7
  1 Top Layer w0.203: v1@34.007,15.993 34.03,15.97 37.939,15.97 U4.61@37.962,15.993
  1 Top Layer w0.254: v1(34,16) v1@34.007,15.993 ; U4.61@37.962,15.993 U4.61@37.993,15.993
  4 Bottom Layer w0.178: 33.493,10.525 33.493,15.543 33.95,16 v1(34,16)
NJTRST: U4.90 XS4.2 | length 33.4
  1 Top Layer w0.254: XS4.2@27.7,9.278 v1(27.7,10.4) ; XS4.2@27.788,8.661 27.813,8.687 27.686,8.814 XS4.2@27.8,8.928 ; U4.90@46.712,7.243 46.7,7.231 46.7,4.8 v1(46.9,4.6)
  4 Bottom Layer w0.254: v1(27.7,10.4) 27.2,9.9 27.2,5.347 29.854,2.692 38.746,2.692 39.649,3.596 39.649,5.512 40.208,6.071 45.367,6.071 46.838,4.6 v1(46.9,4.6)
POE1: C55.1 C56.1 C57.1 C58.2 C67.1 C75.1 C78.1 C79.1 C80.1 R47.1 R57.1 R58.1 T2.1 U9.9 U10.3 | length 83.9
  1 Top Layer w0.254: C67.1@19.609,27.432 19.698,27.522 T2.1@22.352,27.522 22.374,27.5 T2.1@23,27.5
  1 Top Layer w0.381: C57.1@21.7,42.3 v6(22.7,42.3) ; T2.1@22.9,27.6 27.5,27.6 ; v1@28.7,37.4 28.6,37.3 28.6,28.7 27.5,27.6 ; v1(28.8,27.6) 27.5,27.6
  1 Top Layer w0.508: C57.1@21.675,41.775 21,42.45 21,43.7 21.475,44.175 24,44.175 C55.1@24.175,44 ; C78.1@29.566,41.326 C78.1@29.718,41.326 ; C79.1@29.718,43.307 v1(29.718,42.418) C78.1@29.718,41.326 ; C56.1@32.36,50.063 32.36,46.558 31.14,45.339 31.14,41.326 ; C80.1@33.122,41.475 32.972,41.326 31.14,41.326 ; C78.1@29.718,41.326 31.14,41.326
  2 Signal Layer w0.508: v6(22.7,42.3) 23.425,41.575 28.875,41.575 v1(29.718,42.418)
  4 Bottom Layer w0.254: R47.1@29.55,38.592 U9.9@29.55,40.8 ; U9.9@29.566,40.689 29.566,42.213 29.718,42.365 v1(29.718,42.418) ; C75.1@36.449,31.674 36.449,30.353 37.033,29.769 42.189,29.769 42.977,30.556 42.977,31.674 43.917,32.614 43.917,33.858 U10.3@44.399,34.341
  4 Bottom Layer w0.508: R57.1@26.3,26.8 27.3,26.8 28,27.5 28,29.3 28.931,30.231 28.931,31.445 29.439,31.953 36.297,31.953 C75.1@36.5,31.75 ; R58.1@27.165,37.363 v1(28.677,37.363) 29.388,37.363 29.667,37.643 R47.1@29.667,38.456 ; 28.1,27.7 28.2,27.6 v1(28.8,27.6)
POE2: R43.2 T2.2 | length 5.6
  1 Top Layer w0.508: R43.2@18.25,32.5 18.25,32.451 18.621,32.08 19.17,32.08 19.964,31.286 19.964,30.683 20.676,29.972 T2.2@22.428,29.972
POE3: R42.2 T2.3 VT1.2 VT1.4 | length 11.9
  1 Top Layer w0.254: R42.2@18.491,35.103 R42.2@18.517,35.077
  1 Top Layer w0.508: R42.2@18.5,35 19.712,35 20.091,34.62 v1(20.091,32.995) 20.091,32.817 20.408,32.5 T2.3@22.352,32.5
  4 Bottom Layer w0.508: VT1.4@18.1,33 v1@20.091,33 ; VT1.4@18.567,33.604 VT1.4@18.593,33.579 ; v1(20.091,32.995) v1@20.091,33 ; VT1.2@23.952,32.969 23.921,33 VT1.2@23.9,33 v1@20.091,33
POE4: C58.1 C59.2 L3.1 T2.4 | length 19.9
  1 Top Layer w0.254: v1@25.338,34.163 25.375,34.2 v1(25.375,34.125)
  1 Top Layer w0.508: C59.2@18.75,37 21.75,37 22.425,36.325 T2.4@22.425,34.989 ; T2.4@22.352,34.989 T2.4@22.425,34.989 ; v1@25.338,34.163 24.511,34.989 T2.4@22.425,34.989
  4 Bottom Layer w0.508: v1(20.45,36.975) L3.1@20.45,46.475 ; v1(25.375,34.125) 26.925,34.125 C58.1@27.025,34.225
POE5: D17.1 R40.1 T2.5 T2.6 | length 11.9
  1 Top Layer w0.508: T2.6@31.75,32.5 31.75,34.976 T2.5@31.826,35.052 ; T2.5@31.75,34.989 31.725,34.989 31.344,35.37 31.344,37.16 32.283,38.1 R40.1@34.417,38.1 R40.1@34.442,38.1 ; 33.045,38.227 v1(33.045,39.268)
  4 Bottom Layer w0.254: v1(33.045,39.268) 33.071,39.268 33.452,38.887 33.452,37.821 33.461,37.829 D17.1@34.04,37.25
POE7: C61.1 C62.1 C63.1 C64.2 C65.1 T2.7 T2.8 | length 23.2
  1 Top Layer w0.381: v1(29.6,27.5) 30.05,27.95 30.3,27.7 ; v1(33.274,33.731) v1(33.274,31.242) 33.274,31.226 v1@33.3,31.2
  1 Top Layer w0.508: T2.8@31.166,27.661 31.126,27.7 30.4,27.7 29.9,28.2 29.9,29.773 30.201,30.074 T2.7@31.75,30.074 ; T2.8@31.75,27.522 T2.7@31.75,30.011 31.75,30.023 T2.7@31.801,30.074
  4 Bottom Layer w0.254: C61.1@33.274,30.175 C61.1@33.274,30.374 ; v1(33.274,33.731) v1@33.301,33.704 ; C65.1@36.599,33.679 36.61,33.69 C65.1@36.677,33.757
  4 Bottom Layer w0.381: C61.1@33.274,30.374 v1(33.274,31.242) ; v1(33.274,33.731) 36.269,33.731 36.3,33.7 C65.1@36.6,33.7
  4 Bottom Layer w0.508: v1(29.6,27.5) 30.98,27.5 C64.2@31.115,27.635 31.217,27.737 C63.1@32.893,27.737 ; C63.1@32.969,27.838 33.122,27.686 34.749,27.686 C62.1@34.925,27.862 ; C63.1@33.071,28.016 33.147,28.092 C61.1@33.147,29.972
RD_N: R17.1 T1.8 U8.22 | length 9.2
  4 Bottom Layer w0.254: T1.8@29.591,56.007 31.253,56.007 31.623,56.377 ; R17.1@32.855,56 R17.1@32.7,56 32,56 31.7,56.3 31.7,60.2 32,60.5 33.002,60.5 33.024,60.478 33.375,60.478 U8.22@33.401,60.452
RD_P: R16.1 T1.6 U8.23 | length 17.3
  4 Bottom Layer w0.254: R16.1@32.749,54.202 R16.1@32.952,54.405 ; R16.1@32.779,54.534 27.762,54.534 27.356,54.94 27.356,58.09 27.813,58.547 31.047,58.547 31.2,58.7 31.2,60.4 31.76,60.96 U8.23@33.401,60.96
RESET: C16.2 C19.2 R7.1 SB1.1 U4.14 U8.15 XS4.7 | length 115.2
  1 Top Layer w0.254: XS4.7@24.105,4.597 24.181,4.521 24.181,2.972 v1(24.232,2.972) ; v1(50.571,15.494) U4.14@53.467,15.494 ; v1(58.925,14.375) 58.925,13.775 59.2,13.5 R7.1@60.1,13.5 60.2,13.6 60.2,14.4 60.586,14.786 60.586,15.349 C16.2@60.706,15.469
  2 Signal Layer w0.254: v1@24.143,2.985 24.306,2.985 24.319,2.972 49.936,2.972 50.571,3.607 v1@50.571,15.425 ; v1(35.6,57.3) 35.7,57.2 35.7,22.4 36.209,21.891 41.355,21.891 41.91,21.336 41.91,17.04 43.456,15.494 v1(50.571,15.494) ; v1(58.925,14.375) 58.925,15.075 58.9,15.1 58.575,15.425 v1@50.571,15.425 ; v1@50.571,15.425 50.502,15.425 v1(50.571,15.494) ; v1@50.571,15.425 v1(50.571,15.494)
  4 Bottom Layer w0.254: SB1.1@22.758,3.023 22.809,2.972 v1(24.232,2.972) 24.994,2.972 C19.2@25.07,3.048 ; U8.15@35.556,58.315 35.56,58.312 35.56,57.34 v1(35.6,57.3)
RX_N: T1.9 XS5.6 | length 4.3
  4 Bottom Layer w0.254: XS5.6@17.526,55.167 17.598,55.239 17.889,55.239 18.657,56.007 21.497,56.007 T1.9@21.5,56.01
RX_P: T1.11 XS5.3 | length 6.6
  4 Bottom Layer w0.254: XS5.3@14.986,58.977 18.747,58.977 19.177,58.547 21.249,58.547 T1.11@21.373,58.423
SPI3_MEM_CS: U4.66 U5.1 | length 4.4
  1 Top Layer w0.254: U4.66@38.049,13.487 40.818,13.487 v1(41.275,13.03)
  4 Bottom Layer w0.254: v1@41.173,13.03 U5.1@42.062,13.03 ; v1@41.199,13.081 41.25,13.03 v1(41.275,13.03)
SPI3_MISO: U4.79 U5.2 | length 8.8
  1 Top Layer w0.254: U4.79@41.199,7.214 41.199,9.799 42.573,11.173 42.6,11.2 42.6,14.1 v1(42.5,14.2)
  4 Bottom Layer w0.254: v1(42.5,14.2) 42.605,14.095 42.605,13.05 U5.2@42.625,13.03
SPI3_MOSI: U4.80 U5.5 | length 5.6
  1 Top Layer w0.254: U4.80@41.707,7.315 41.707,9.22 42.316,9.83 v1(44.399,9.83)
  4 Bottom Layer w0.254: U5.5@43.625,9.83 44.374,9.83 v1(44.399,9.83)
SPI3_SCK: U4.78 U5.6 | length 7.7
  1 Top Layer w0.254: U4.78@40.716,7.366 40.716,11.191 v1(41.225,11.7)
  4 Bottom Layer w0.254: 41.57,11.75 42.581,11.75 43.125,11.205 U5.6@43.125,9.83
SWCLK: U4.76 XS4.3 | length 18.5
  1 Top Layer w0.254: XS4.3@26.594,4.623 26.594,3.406 26.943,3.057 39.227,3.057 39.726,3.556 U4.76@39.726,7.315
SWDIO: U4.72 XS4.1 | length 17.8
  1 Top Layer w0.254: XS4.1@27.889,4.572 38.76,4.572 39.014,4.826 39.014,10.287 38.808,10.493 U4.72@37.962,10.493
TD_N: R15.1 T1.3 U8.20 | length 18.4
  2 Signal Layer w0.254: v1@31.4,62.475 31.1,62.175 31.1,59.824 31.746,59.178 32.508,59.178 v1@32.512,59.182
  4 Bottom Layer w0.127: v1(32.534,59.178) v1@32.622,59.305
  4 Bottom Layer w0.254: v1(31.35,62.475) 27.475,62.475 27.125,62.825 27.125,65.575 27.59,66.04 R15.1@32.728,66.04 ; v1@32.622,59.305 32.765,59.448 U8.20@33.423,59.448
TD_P: R14.1 T1.1 U8.21 | length 10.4
  2 Signal Layer w0.254: v1(32.3,59.9) 32.5,60.1 32.5,62.344 32.55,62.393 v1@32.55,62.475
  4 Bottom Layer w0.127: v1(32.3,59.9) 32.494,59.9 32.543,59.948 ; v1@32.385,62.611 32.512,62.611 32.385,62.484 v1(32.512,62.484) ; R14.1@32.575,64.198 R14.1@32.639,64.262
  4 Bottom Layer w0.254: T1.1@29.718,64.897 31.253,64.897 31.75,64.4 31.75,63.246 v1@32.385,62.611 ; v1(32.512,62.484) 32.575,62.547 R14.1@32.575,64.198 ; 32.543,59.948 U8.21@33.423,59.948
TX_N: T1.14 XS5.2 | length 4.9
  4 Bottom Layer w0.254: XS5.2@17.526,60.247 19.639,62.36 T1.14@21.5,62.36 21.587,62.36 T1.14@21.59,62.357
TX_P: T1.16 XS5.1 | length 9.8
  4 Bottom Layer w0.254: XS5.1@14.986,61.517 15.205,61.736 15.205,64.355 15.747,64.897 T1.16@21.497,64.897 ; T1.16@21.303,64.703 T1.16@21.497,64.897 ; T1.16@21.5,64.9 T1.16@21.497,64.897 ; T1.16@21.59,64.897 T1.16@21.497,64.897
USB_D_N: D7.3 U4.70 XS3.2 | length 43.3
  1 Top Layer w0.254: XS3.2@4.47,7.29 4.481,7.3 v1(7.5,7.3) ; 6.736,7.336 7.604,8.204 D7.3@8.077,8.204 ; U4.70@37.962,11.493 39.405,11.493 39.596,11.684 v1(39.649,11.684) v1@39.675,11.684
  2 Signal Layer w0.254: v1(7.5,7.3) 8.119,6.681 38.533,6.681 38.976,7.125 38.976,10.975 39.649,11.648 v1(39.649,11.684)
USB_D_P: D7.4 U4.71 XS3.3 | length 43.3
  1 Top Layer w0.254: XS3.3@4.449,6.655 4.494,6.7 7,6.7 7.1,6.7 ; v1(7.1,6.3) 7.1,6.7 ; D7.4@8.052,5.893 8.044,5.901 8.1,5.957 8.1,6.592 7.992,6.7 7.1,6.7 ; U4.71@37.967,10.998 U4.71@37.962,10.993 39.401,10.993 v1@39.751,10.643
  2 Signal Layer w0.254: v1(7.1,6.3) 39.041,6.3 39.726,6.985 v1(39.726,10.643)
USB_ID: D7.6 U4.69 XS3.4 | length 44.7
  1 Top Layer w0.254: XS3.4@4.496,6.045 4.498,6.043 6.429,6.043 6.706,5.766 6.706,4.394 7.1,4 9.7,4 9.967,4.267 D7.6@9.967,5.855 9.967,5.923 10.444,6.4 18.3,6.4 18.95,7.05 19.787,7.887 v1(19.787,7.925) ; U4.69@38.049,11.989 38.913,11.989 39.575,12.651 v1(39.575,12.75)
  2 Signal Layer w0.254: v1(19.787,7.925) 19.812,7.95 37.15,7.95 38.481,9.281 38.481,11.681 39.55,12.75 v1(39.575,12.75)
USB_VBUS: D4.1 D7.1 R3.1 XS3.1 | length 36.6
  1 Top Layer w0.254: XS3.1@4.598,8 6.324,8 6.4,8.076 6.376,8.1 v1(6.3,8.1)
  1 Top Layer w0.508: D7.1@9.957,8.052 v1(10.871,8.052) 11.348,8.052 11.608,7.792 11.608,7.636 11.624,7.62 D4.1@11.884,7.62 ; v1(29.375,12.325) 29.4,12.35 v1(30.025,12.35) v1(30.675,12.35) 34.03,12.35 R3.1@34.112,12.268
  4 Bottom Layer w0.508: v1(6.3,8.1) 10.772,8.1 10.846,8.026 v1(10.871,8.052) 11.633,8.814 25.044,8.814 25.578,9.347 25.578,11.811 26.117,12.35 v1(30.025,12.35) v1(30.675,12.35)
VCC_BAT: C6.2 U3.5 U3.8 XS2.2 | length 10.7
  1 Top Layer w0.254: U3.8@56.625,64.525 57.5,64.525 57.55,64.475
  1 Top Layer w0.508: U3.5@56.625,62.425 56.625,61.975 57.225,61.375 57.825,61.375 ; 57.55,64.475 57.85,64.175 57.85,61.375 ; XS2.2@57.875,59.575 57.85,59.6 57.85,61.35 57.825,61.375 ; C6.2@59.125,63.075 59.1,63.05 59.1,61.673 58.802,61.375 57.85,61.375 ; 57.825,61.375 57.85,61.375
VIN: C1.2 pad.2 U1.10 U1.11 U1.12 U1.13 XS1.1 | length 28.1
  1 Top Layer w0.254: U1.13@18.25,15.65 18.25,16.95 ; U1.10@18.9,14 19.5,14 19.925,14.425 ; U1.11@18.9,14.5 19.35,14.5 19.914,15.064 ; U1.12@18.9,15 19.216,15 19.914,15.697 ; C1.2@19.95,18.8 19.95,18.35 20.05,18.25 C1.2@20.05,18.225
  1 Top Layer w0.508: XS1.1@12.95,27.45 XS1.1@12.95,26.766 ; pad.2@15.575,26.375 13.341,26.375 XS1.1@12.95,26.766 ; 18.25,16.95 19,17.7 C1.2@19.375,17.7 ; 19.925,14.425 C1.2@19.925,17.9 ; C1.2@19.95,18.8 19.95,22.375 19.425,22.9 13.975,22.9 12.95,23.925 XS1.1@12.95,26.766
pads on no net: T1.4 T1.5 T1.12 T1.13 U3.2 U3.6 U3.7 U4.1 U4.2 U4.3 U4.4 U4.5 U4.7 U4.15 U4.17 U4.18 U4.23 U4.26 U4.37 U4.42 U4.43 U4.44 U4.45 U4.46 U4.62 U4.63 U4.67 U4.81 U4.82 U4.83 U4.84 U4.85 U4.86 U4.87 U4.88 U4.92 U4.93 U4.94 U4.95 U4.96 U4.97 U4.98 U4.99 U6.1 U6.4 U6.11 U6.14 U7.14 U7.15 U7.16 U7.17 U7.18 U11.1 U11.2 XS4.9 XS4.10 XS5.None

## Polygon pours and split planes (outlines as drawn)
GND on 3 GND Layer "GND Layer-GND" (solid, remove dead copper, pour order 4): 0.51,70.75 0.51,0.5 20.75,0.52 72.25,0.5 72.25,70.75
GND on 4 Bottom Layer "GND Layer-GND" (solid, remove dead copper, pour order 6): 0.705,70.84 0.705,0.59 20.945,0.61 72.445,0.59 72.445,70.84
GND on 1 Top Layer "Top Layer-GND" (solid, remove dead copper, pour order 12): 0.751,71.363 0.751,1.113 20.991,1.133 72.491,1.113 72.491,71.363